# Altium PCB clock-temp-touch-sw.PcbDoc
Units mm, origin at the board's own origin, x right, y up, seen from the top; angles counter-clockwise.
Board outline 151 x 86.38 mm, 2 copper layers (Top Layer, Bottom Layer); 69 components, 37 nets, 179 pads, 0 vias.
Unrouted connection lines stored in the file: 14.
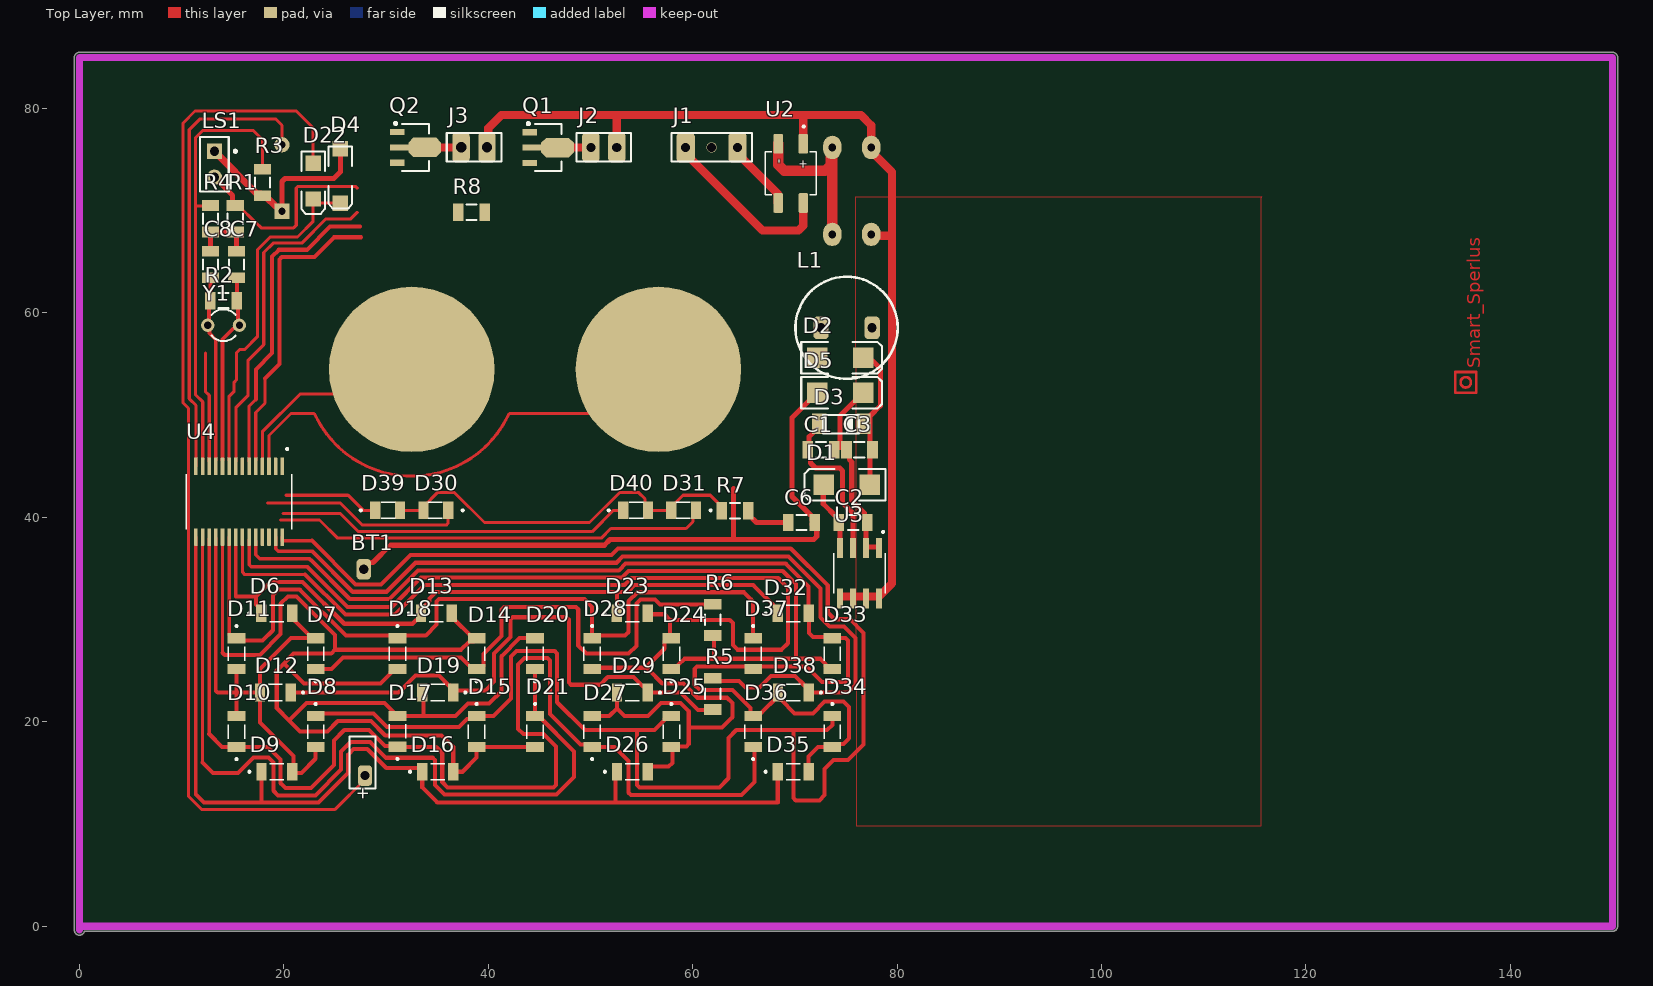
[diagram p0: Top Layer view]
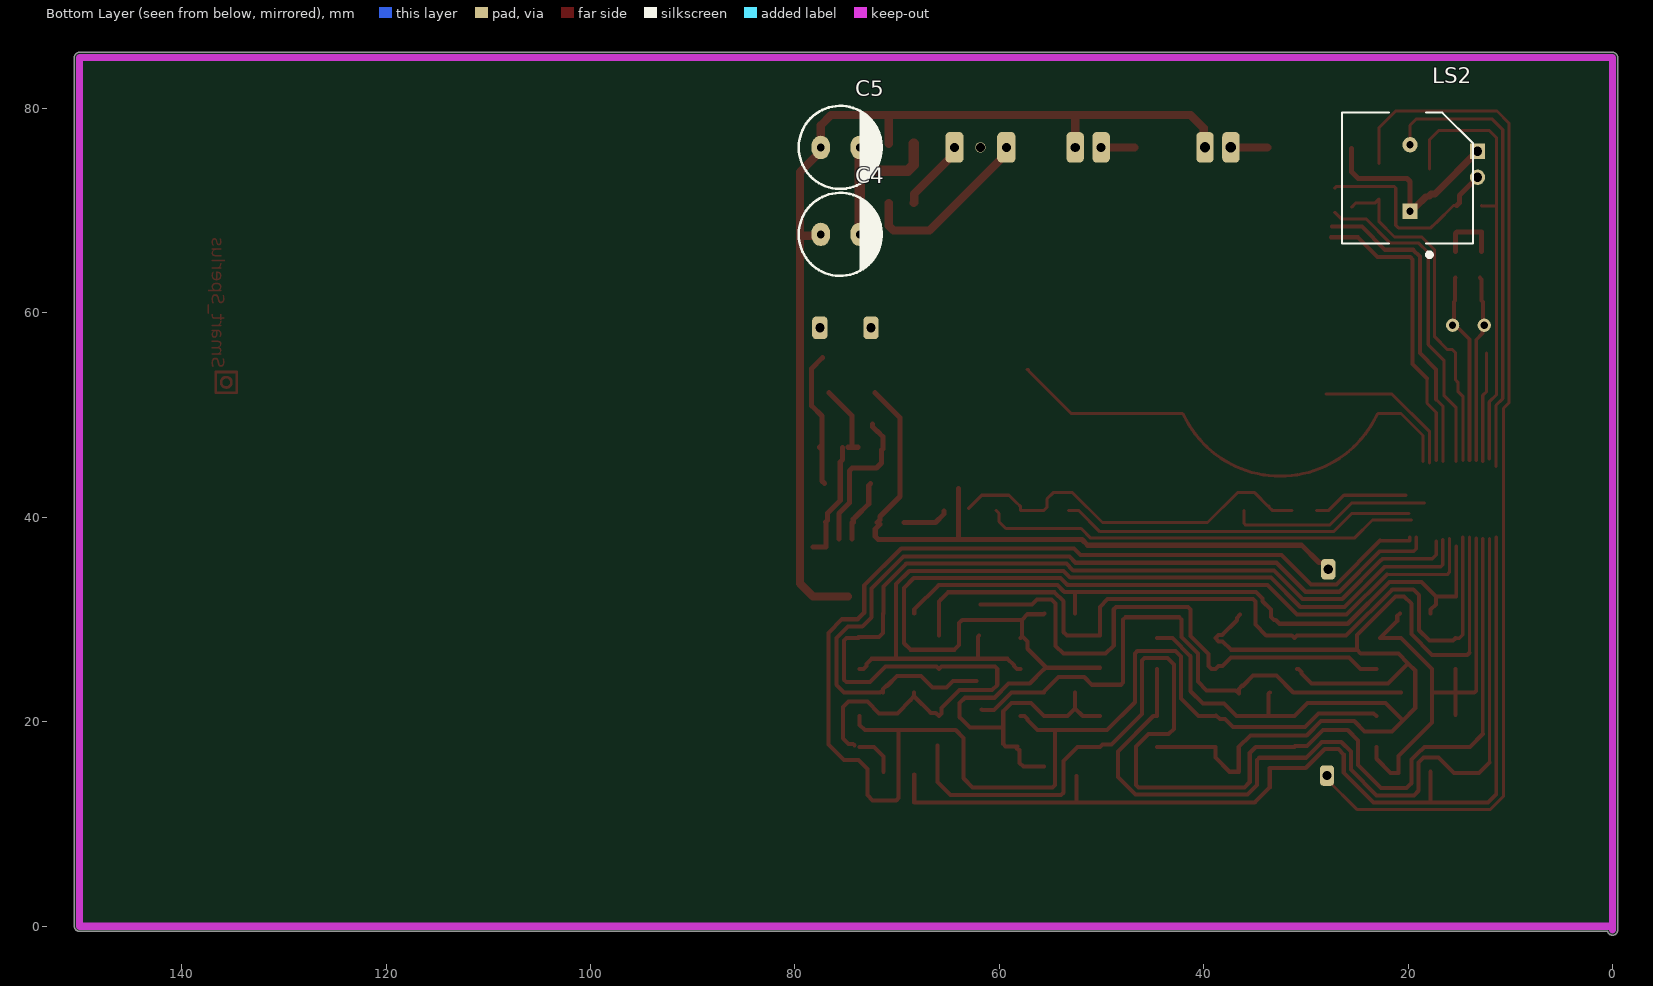
[diagram p1: Bottom Layer view, seen from below]

## Layer stack, top to bottom
Top Solder: solder mask 0.0102, Solder Resist, Dk 3.5
Top Layer: signal copper 0.0356
Dielectric 1: dielectric 0.32, FR-4, Dk 4.8
Bottom Layer: signal copper 0.0356
Bottom Solder: solder mask 0.0102, Solder Resist, Dk 3.5

## Board outline
-0.5,-0.381 -0.5,85 cw(c0,85) 0,85.5 150,85.5 cw(c150,85) 150.5,85 150.5,0 cw(c150,0) 150,-0.5 0.486,-0.5 cw(c0,-0.381)

## Design rules (kind name [scope] priority, off if disabled: settings)
Clearance Clearance_1 [InPolygon] p1: gap=0.3 ignorepadtopadclearanceinfootprint=FALSE
Clearance [All] p2: gap=0.3 ignorepadtopadclearanceinfootprint=FALSE
PolygonConnect [All] p1: connectstyle=Relief reliefconductorwidth=0.254 reliefentries=4 polygonreliefangle="90 Angle" airgapwidth=0.254
RoomDefinition clock-temp-touch-sw [InComponentClass('clock-temp-touch-sw')] p1: confinementstyle=ConfineIn formatcopy=TRUE lockcomponents=FALSE outline 144.907,-4.953 247.904,-4.953 247.904,23.114 144.907,23.114
RoutingLayers [All] p1: top layer_v5=FALSE bottom layer_v5=TRUE
RoutingVias [All] p1: holewidth=0.711 width=2.5 viastyle="Through Hole" minholewidth=0.711 minwidth=1.27 maxholewidth=0.711 maxwidth=2
SolderMaskExpansion [All] p1: expansion=0.102 istentingtop=FALSE
Width [All] p1: maxlimit=3 minlimit=0.3 preferedwidth=1
29 further rules are at their usual default settings.

## Components (designator, comment, footprint, x,y, rotation, side; value= is the part's Value field where it differs from the comment)
BT1 "Battery" BAT-2 27.686,16.002 r90 top
C1 "=Value" "CAP 1206"#1 72.517,46.609 r0 top
C2 "=Value" "CAP 1206"#2 75.692,39.497 r0 top
C3 "=Value" "CAP 1206"#3 76.327,46.609 r180 top
C4 "=Value" ELEC-CAP-RAD15-30 75.565,67.691 r0 bottom
C5 "=Value" ELEC-CAP-RAD15-30 75.565,76.2 r0 bottom
C6 "=Value" "CAP 1206"#1 70.612,39.497 r0 top
C7 "=Value" "CAP 1206"#1 15.367,64.77 r270 top
C8 "=Value" "CAP 1206"#1 12.827,64.77 r270 top
D1 "D Schottky" SMB 75.057,43.18 r180 top
D2 "D Schottky" SMB 74.422,55.626 r0 top
D3 "Zener Diode" DO-35 72.009,49.149 r0 top
D4 "18 Zener" 3.2X1.6X1.1#1 25.527,73.406 r270 top
D5 "D Schottky" SMB 74.422,52.197 r0 top
D6 "LHN974_RED_LED_1206" LEDC3216X120N#1 19.304,30.607 r0 top
D7 "LHN974_RED_LED_1206" LEDC3216X120N#1 23.114,26.67 r90 top
D8 "LHN974_RED_LED_1206" LEDC3216X120N#1 23.114,19.05 r270 top
D9 "LHN974_RED_LED_1206" LEDC3216X120N#1 19.318,15.113 r0 top
D10 "LHN974_RED_LED_1206" LEDC3216X120N#1 15.367,19.05 r90 top
D11 "LHN974_RED_LED_1206" LEDC3216X120N#1 15.367,26.67 r270 top
D12 "LHN974_RED_LED_1206" LEDC3216X120N#1 19.177,22.86 r180 top
D13 "LHN974_RED_LED_1206" LEDC3216X120N#1 34.925,30.607 r0 top
D14 "LHN974_RED_LED_1206" LEDC3216X120N#1 38.862,26.67 r90 top
D15 "LHN974_RED_LED_1206" LEDC3216X120N#1 38.862,19.05 r270 top
D16 "LHN974_RED_LED_1206" LEDC3216X120N#1 35.052,15.113 r0 top
D17 "LHN974_RED_LED_1206" LEDC3216X120N#1 31.115,19.064 r90 top
D18 "LHN974_RED_LED_1206" LEDC3216X120N#1 31.115,26.67 r270 top
D19 "LHN974_RED_LED_1206" LEDC3216X120N#1 35.052,22.86 r180 top
D20 "LHN974_RED_LED_1206" LEDC3216X120N#1 44.577,26.67 r90 top
D21 "LHN974_RED_LED_1206" LEDC3216X120N#1 44.577,19.05 r270 top
D22 "D Tunnel1" 3.2X1.6X1.1#2 22.86,72.898 r270 top
D23 "LHN974_RED_LED_1206" LEDC3216X120N#1 54.088,30.607 r0 top
D24 "LHN974_RED_LED_1206" LEDC3216X120N#1 57.912,26.67 r90 top
D25 "LHN974_RED_LED_1206" LEDC3216X120N#1 57.912,19.05 r270 top
D26 "LHN974_RED_LED_1206" LEDC3216X120N#1 54.102,15.113 r0 top
D27 "LHN974_RED_LED_1206" LEDC3216X120N#1 50.165,19.05 r90 top
D28 "LHN974_RED_LED_1206" LEDC3216X120N#1 50.165,26.67 r270 top
D29 "LHN974_RED_LED_1206" LEDC3216X120N#1 54.102,22.86 r180 top
D30 "LHN974_RED_LED_1206" LEDC3216X120N#2 34.798,40.693 r180 top
D31 "LHN974_RED_LED_1206" LEDC3216X120N#2 59.055,40.693 r180 top
D32 "LHN974_RED_LED_1206" LEDC3216X120N#1 69.836,30.607 r0 top
D33 "LHN974_RED_LED_1206" LEDC3216X120N#1 73.66,26.67 r90 top
D34 "LHN974_RED_LED_1206" LEDC3216X120N#1 73.66,19.05 r270 top
D35 "LHN974_RED_LED_1206" LEDC3216X120N#1 69.836,15.113 r0 top
D36 "LHN974_RED_LED_1206" LEDC3216X120N#1 65.913,19.05 r90 top
D37 "LHN974_RED_LED_1206" LEDC3216X120N#1 65.913,26.67 r270 top
D38 "LHN974_RED_LED_1206" LEDC3216X120N#1 69.85,22.86 r180 top
D39 "LHN974_RED_LED_1206" LEDC3216X120N#2 30.226,40.693 r0 top
D40 "LHN974_RED_LED_1206" LEDC3216X120N#2 54.483,40.693 r0 top
J1 "Header3X1" "HEADER 3X1" 59.309,76.2 r0 top
J2 "Header2X1" "Header 2X1"#1 51.308,76.2 r0 top
J3 "Header2X1" "Header 2X1"#2 38.608,76.2 r0 top
L1 "1mH" HS1101 75.057,58.547 r0 top
LS1 "Bell" PIN2 13.208,75.819 r270 top
LS2 "Buzzer" ABSM-1574 20.052,67.304 r90 bottom
Q1 "Triac" SOT89N 45.869,76.176 r0 top
Q2 "Triac" SOT89N 32.882,76.2 r0 top
R1 "10K" "RES 1206 (3216X08L)"#1 15.24,69.215 r90 top
R2 "10K" "RES 1206 (3216X08L)"#1 14.097,61.214 r0 top
R3 "10K" "RES 1206 (3216X08L)"#1 17.907,72.771 r270 top
R4 "10K" "RES 1206 (3216X08L)"#1 12.827,69.215 r270 top
R5 "10K" "RES 1206 (3216X08L)"#2 61.976,22.733 r90 top
R6 "10K" "RES 1206 (3216X08L)"#2 61.976,29.972 r90 top
R7 "10K" "RES 1206 (3216X08L)"#1 64.135,40.64 r180 top
R8 "10K" "RES 1206 (3216X08L)"#1 38.354,69.85 r0 top
U2 "MB6S" SOIC245P670X270-4N 69.596,73.66 r270 top
U3 "HT7A6312" SOIC127P599X175-8N 76.327,34.544 r270 top
U4 "MAX3241ECAI+T" SOP65P777X199-28N 15.621,41.529 r270 top
Y1 "XTAL" R38 14.097,58.801 r90 top

## Footprints (in the part's own frame and the unit in brackets; to place one, negate y for a bottom-side part, rotate by r counter-clockwise, add the part's x,y. Pads: shape width x height; smd on the part's side, far side on the other; paste and mask are expansions set on the pad)
3.2X1.6X1.1#1 [mm] "SMT LED; 2 Flat Leads"
  rect 1.5x1.5 smd: 1(-2.667,0) 2(2.667,0)
  silkscreen extent -2.9,-1.15 3.2,1.15
3.2X1.6X1.1#2 [mm] "SMT LED; 2 Flat Leads"
  rect 1.5x1.5 smd: 1(-1.75,0) 2(1.75,0)
  silkscreen extent -2.9,-1.15 3.2,1.15
ABSM-1574 [mm] "Magnetic Transducer Buzzer"
  rect 1.5x1.5 hole 0.7: 1A(2.65,-0.24)
  round 1.5 hole 0.7: 2A(9.15,-0.24)
  silkscreen extent -1.83,-6.4 12.3,6.4
BAT-2 [mm] "Battery; 2 Leads"
  rrect50% 2x1.4 hole 0.9: 1(-1.27,-0.254) 2(18.923,-0.127)
  silkscreen extent -2.54,-1.27 2.54,1.27
"CAP 1206"#1 [mm]
  rect 1.05x1.7 smd: 1(-1.27,0) 2(1.326,0)
  silkscreen extent -0.47,-0.75 0.53,0.75, body extent -1.49,-0.77 1.55,0.75, height 0.75
"CAP 1206"#2 [mm]
  rect 1.05x1.7 smd: 1(-1.397,0) 2(1.397,0)
  silkscreen extent -0.47,-0.75 0.53,0.75, body extent -1.49,-0.77 1.55,0.75, height 0.75
"CAP 1206"#3 [mm]
  rect 1.05x1.7 smd: 1(-1.27,0) 2(1.27,0)
  silkscreen extent -0.47,-0.75 0.53,0.75, body extent -1.49,-0.77 1.55,0.75, height 0.75
DO-35 [mm]
  rect 1.4x2 smd: 1(0.381,0) 2(4.699,0)
  silkscreen extent 0.76,-0.93 4.27,0.87, body extent -0.17,-0.81 5.35,0.84, height 1.81
ELEC-CAP-RAD15-30 [mil]
  oval 70x90 hole 30: 1(-75,0) 2(75,0)
  silkscreen extent -160,-160 160,160, body extent -167,-167 167,167, height 609
"Header 2X1"#1 [mm]
  rrect50% 1.7x3 hole 0.9: 1(-1.27,0) 2(1.27,0)
  silkscreen extent -2.67,-1.4 2.67,1.4, body extent -2.54,-1.27 2.54,1.27, height 9.5
"Header 2X1"#2 [mm]
  rrect50% 1.7x3 hole 1.016: 1(-1.27,0) 2(1.27,0)
  silkscreen extent -2.67,-1.4 2.67,1.4, body extent -2.54,-1.27 2.54,1.27, height 9.5
"HEADER 3X1" [mm]
  rrect50% 1.8x3 hole 0.9: 1(0,0) 3(5.08,0)
  round 1 hole 0.9: 2(2.54,0)
  silkscreen extent -1.4,-1.4 6.48,1.4, body extent -1.24,-1.27 6.38,1.27, height 8.38
HS1101 [mm] "HUMIDITY SENSOR"
  rrect50% 1.5x2.2 hole 0.9: 1(2.5,0) 2(-2.5,0)
  silkscreen extent -5,-5 5,5
LEDC3216X120N#1 [mm]
  rect 1.01x1.73 smd: NEG(1.51,0) POS(-1.51,0)
  silkscreen extent -2.8,-0.8 0.68,0.8
LEDC3216X120N#2 [mm]
  rect 1.01x1.73 smd: NEG(1.143,0) POS(-1.27,0)
  silkscreen extent -2.8,-0.8 0.68,0.8
PIN2 [mm] "Photosensitive Diode; 2 Leads"
  rect 1.5x1.5 hole 0.9: 1(0,0)
  round 1.5 hole 0.9: 2(2.54,0)
  silkscreen extent -1.4,-1.4 3.94,2.18
R38 [mm] "Crystal, Thru-Hole; 2 Leads; Body 3.1 x 8.2 mm (Dia.xH)"
  round 1.3 hole 0.7: 1(0,1.55) 2(0,-1.55)
  silkscreen extent -1.55,-1.19 1.55,1.17
"RES 1206 (3216X08L)"#1 [mm] "Chip Resistor, 2-Leads, Body 3.2x1.6mm, IPC High Density _ (0.125 W)"
  rect 1.05x1.7 smd: 1(-1.295,0) 2(1.301,0)
  silkscreen extent -0.5,-0.75 0.5,0.75, body extent -1.52,-0.76 1.53,0.76, height 0.6
"RES 1206 (3216X08L)"#2 [mm] "Chip Resistor, 2-Leads, Body 3.2x1.6mm, IPC High Density _ (0.125 W)"
  rect 1.05x1.7 smd: 1(-1.524,0) 2(1.524,0)
  silkscreen extent -0.5,-0.75 0.5,0.75, body extent -1.52,-0.76 1.53,0.76, height 0.6
SMB [mm] "DO-214-AA/SMB; 2 C-Bend Leads; Body 5.3 x 3.6 mm, inc. leads (LxW)"
  rect 2x2 smd: 1(-2.25,0) 2(2.25,0)
  silkscreen extent -3.8,-1.55 4.1,1.55
SOIC127P599X175-8N [mm]
  rrect25% 1.97x0.6 smd: 1(-2.47,1.905) 2(-2.47,0.635) 3(-2.47,-0.635) 4(-2.47,-1.905) 5(2.47,-1.905) 6(2.47,-0.635) 7(2.47,0.635) 8(2.47,1.905)
  silkscreen extent -4.14,-2.52 1.95,2.52
SOIC245P670X270-4N [mm]
  rrect23% 1.91x0.91 smd: 1(-2.9,1.225) 2(-2.9,-1.225) 3(2.9,-1.225) 4(2.9,1.225)
  silkscreen extent -4.68,-2.48 2.1,2.48
SOP65P777X199-28N [mm]
  rrect25% 1.7x0.35 smd: 1(-3.46,4.225) 2(-3.46,3.575) 3(-3.46,2.925) 4(-3.46,2.275) 5(-3.46,1.625) 6(-3.46,0.975) 7(-3.46,0.325) 8(-3.46,-0.325) 9(-3.46,-0.975) 10(-3.46,-1.625) 11(-3.46,-2.275) 12(-3.46,-2.925) 13(-3.46,-3.575) 14(-3.46,-4.225) 15(3.46,-4.225) 16(3.46,-3.575) 17(3.46,-2.925) 18(3.46,-2.275) 19(3.46,-1.625) 20(3.46,-0.975) 21(3.46,-0.325) 22(3.46,0.325) 23(3.46,0.975) 24(3.46,1.625) 25(3.46,2.275) 26(3.46,2.925) 27(3.46,3.575) 28(3.46,4.225)
  silkscreen extent -5.26,-5.17 2.69,5.17, body extent -3.89,-5.1 3.89,5.1, height 1.99
SOT89N [mm] "SOT89, 3-Leads, Body 4.5x2.4 mm, Pitch 1.5mm, Lead Span 4.1mm, IPC Medium Density"
  rect 1.4x0.6 smd: 1(-1.8,1.5) 3(-1.8,-1.5)
  rect 1.8x0.6 smd: 2(-1.6,0)
  oct 3.2x1.9 smd: 2(0.9,0)
  silkscreen extent -2.07,-2.3 1.3,2.47, body extent -1.3,-2.3 1.3,2.3, height 1.6

## Part data
BT1: "Multicell Battery", LatestRevisionDate=17-Jul-2002, LatestRevisionNote="Re-released for DXP Platform.", PackageDescription="Battery; 2 Leads", PackageReference=BAT-2, Published=24-Mar-1999, Publisher="Altium Limited"
C1 C2 C3 C6 C7 C8: library part Capacitor, "Capacitor"
C4 C5: library part "Capacitor Electrolytic", "Electrolytic Capacitor"
D1 D2 D5: "Schottky Diode", Code_JEDEC=DO-214-AA, LatestRevisionDate=17-Jul-2002, LatestRevisionNote="Re-released for DXP Platform.", PackageDescription="DO-214-AA/SMB; 2 C-Bend Leads; Body 5.3 x 3.6 mm, inc. leads (LxW)", PackageReference=SMB, Published=8-Jun-2000, Publisher="Altium Limited"
D4: library part "D Zener", "Zener Diode", LatestRevisionDate=17-Jul-2002, LatestRevisionNote="Re-released for DXP Platform.", PackageReference=DIODE-0.7, Published=8-Jun-2000, Publisher="Altium Limited"
D6 D7 D8 D9 D10 D11 D12 D13 D14 D15 D16 D17 D18 D19 D20 D21 D23 D24 D25 D26 D27 D28 D29 D30 D31 D32 D33 D34 D35 D36 D37 D38 D39 D40: "2.6 V Red LED SMD", Package=None, Availability="Not in stock", Check_prices=https://www.snapeda.com/parts/LHN974%20RED%20LED%201206/Osram/view-part/7899607/?ref=eda, MF=Osram, MP="LHN974 RED LED 1206", Price=None, SnapEDA_Link=https://www.snapeda.com/parts/LHN974%20RED%20LED%201206/Osram/view-part/7899607/?ref=snap
D22: "Tunnel Diode - RLC Model", LatestRevisionDate=17-Jul-2002, LatestRevisionNote="Re-released for DXP Platform.", PackageDescription="SM LED; 2 Flat Leads", PackageReference=3.2X1.6X1.1, PackageVersion=Feb-2002, Published=8-Jun-2000, Publisher="Altium Limited"
L1: library part Inductor, "Inductor", Code_IEC=1005, Code_JEITA=0402, LatestRevisionDate=17-Jul-2002, LatestRevisionNote="Re-released for DXP Platform.", PackageReference=0402-A, Published=8-Jun-2000, Publisher="Altium Limited"
LS1: "Electrical Bell", LatestRevisionDate=17-Jul-2002, LatestRevisionNote="Re-released for DXP Platform.", PackageReference=PIN2, Published=24-Mar-1999, Publisher="Altium Limited"
LS2: "Magnetic Transducer Buzzer", ComponentLink1Description="Manufacturer Link", ComponentLink1URL=http://www.megastar.com/linecard/buzzmode/index.php, DatasheetVersion=17-Dec-2003, LatestRevisionDate=17-Dec-2003, LatestRevisionNote="Schematic revised, PCB Footprint replaced.", PackageDescription="Magnetic Transducer Buzzer", PackageReference=ABSM-1574, Published=24-Mar-1999, Publisher="Altium Limited"
Q1 Q2: "Silicon Bidirectional Triode Thyristor", ComponentLink1Description="Manufacturer Link", ComponentLink1URL=http://www.motorola.com/, DatasheetVersion=1999, LatestRevisionDate=17-Jul-2002, LatestRevisionNote="Re-released for DXP Platform.", Note="Pin 2 is electrically connected to Pin 4 (TAB)", PackageDescription="TO, Thru-Hole, Vertical, Heatsink Mounted; 3 In-Line Leads; Pitch 2.28 mm", PackageReference=369-03, Published=29-Sep-2000, Publisher="Altium Limited"
R1 R2 R3 R4 R5 R6 R7 R8: library part Resistor, "Resistor", Power="1/4 W", Tolerance=5%
U2: "Bridge Rectifier Single Phase Standard 600V Surface Mount 4-SOIC", Package="BESOP-4 Surge Components", Digi-Key_Part_Number=MB6SCT-ND, Digi-Key_Purchase_URL=https://www.digikey.com.tr/product-detail/en/on-semiconductor/MB6S/MB6SCT-ND/965654?utm_source=snapeda&utm_medium=aggregator&utm_campaign=symbol, MF="ON Semiconductor", MP=MB6S, SnapEDA_Link=https://www.snapeda.com/parts/MB6S/ON%20Semiconductor/view-part/2774209/?ref=snap
U3: library part Component_1
U4: "±15kV ESD-Protected, Down to 10nA, 3.0V to 5.5V, Up to 1Mbps, True RS-232 Transceivers", Package="SSOP-28 Maxim", Check_prices=https://www.snapeda.com/parts/MAX3241ECAI+T/Analog+Devices/view-part/?ref=eda, MF="Analog Devices", MP=MAX3241ECAI+T, SnapEDA_Link=https://www.snapeda.com/parts/MAX3241ECAI+T/Analog+Devices/view-part/?ref=snap
Y1: "Crystal Oscillator", LatestRevisionDate=17-Jul-2002, LatestRevisionNote="Re-released for DXP Platform.", PackageDescription="Crystal, Thru-Hole; 2 Leads; Body 3.1 x 8.2 mm (Dia.xH)", PackageReference=R38, Published=8-Jun-2000, Publisher="Altium Limited"
D3: MODEL=1N

## Free pads (board coordinates)
  round 16.2 smd: 10(32.512,54.483) 10(56.642,54.483)

## Nets (pads, with @x,y where several pads share a name; then routed paths per layer and width w, separated by ;. In a path a pad name is that pad's centre, name@x,y a point inside that pad or via, vN(x,y) a via of type N, cw(c..) or ccw(c..) an arc to the next point about the centre after c; other vN are vias at no path point)
+12v: C6.1 D2.1 D4.2 L1.2 R7.1 | length 4.6
  Top Layer w0.5: R7.1 65.43,40.315 66.248,39.497 C6.1
adc: LS1.2 R1.2 U4.8 | length 52.7
  Top Layer w0.3: R1.2 15.565,70.516 17.247,68.834 17.272,68.834 17.78,68.326 20.955,68.326 21.209,68.58 21.209,72.214 21.385,72.39 27.002,72.39 27.178,72.214 ; U4.8@15.296,45.466 15.296,50.729 16.51,51.943 16.51,55.372 18.034,56.896 18.034,65.913 18.953,66.832 21.747,66.832 24.13,69.215 26.543,69.215 27.178,69.85
  Top Layer w0.5: LS1.2 14.989,71.498 14.989,70.766 R1.2
bizer: LS2.2A U4.14 | length 44.9
  Top Layer w0.3: U4.14 11.396,50.961 10.742,51.615 10.742,77.925 11.811,78.994 19.177,78.994 19.812,78.359 LS2.2A
dot: D20.POS D21.POS U4.16 | length 82.3
  Top Layer w0.33: U4.16@12.036,37.894 12.036,16.046 12.051,16.031
  Top Layer w0.4: 12.051,16.031 12.051,16.016 13.081,14.986 15.494,14.986 17.018,16.51 18.488,16.51 18.966,16.032 18.966,13.253 19.411,12.807 23.094,12.807 25.602,15.315 25.602,17.093 26.543,18.034 28.448,18.034 30.004,16.478 34.564,16.478 34.798,16.244 34.798,13.81 35.719,12.889 46.665,12.889 48.387,14.611 48.387,17.11 44.937,20.56 D21.POS D20.POS
GND: BT1.2 C4.1 C5.1 C6.2 C7.1 C8.1 D4.1 D5.1 Q1.3 Q2.3 R1.1 R4.2 U2.2 U4.12 | length 101.7
  Top Layer w0.3: 12.319,56.089 12.319,52.324 12.7,51.943 U4.12@12.7,45.466
  Top Layer w0.5: C8.1 R4.2 12.83,67.917 15.237,67.917 15.367,67.787 C7.1 ; BT1.2 27.813,35.133 28.255,35.576 28.718,35.576 30.415,37.273 51.344,37.273 51.917,37.846 64.008,37.846 ; 64.008,42.799 64.008,37.846 ; C6.2@71.663,39.331 72.136,38.858 72.136,38.139 71.843,37.846 64.008,37.846 ; C6.2 71.663,39.772 71.663,40.097 69.723,42.037 69.723,49.748 D5.1
  Top Layer w1: U2.2 68.371,74.504 68.961,73.914 72.947,73.914 73.511,74.478 73.511,76.051 C5.1 C4.1
inpout: R3.1 R4.1 U4.13 | length 43.3
  Top Layer w0.3: U4.13@12.065,45.72 12.065,51.308 11.342,52.031 11.342,70.485 ; R4.1 12.802,70.485 11.342,70.485 ; R3.1 17.907,76.962 17.018,77.851 12.065,77.851 11.342,77.128 11.342,70.485
l1: D6.POS D13.POS D23.POS D32.POS U4.21 | length 67.7
  Top Layer w0.33: 15.286,37.194 15.286,32.297 15.311,32.272
  Top Layer w0.4: 15.311,32.272 17.286,32.272 ; D6.POS 17.794,30.967 17.286,31.475 17.286,32.272 ; D23.POS 52.578,32.698 ; D32.POS 68.326,30.967 65.921,33.372 54.306,33.372 53.694,32.76 53.632,32.698 52.578,32.698 ; 17.286,32.272 18.672,33.658 21.841,33.658 25.908,29.591 32.602,29.591 32.953,29.942 33.11,29.942 33.415,30.247 33.415,30.967 34.243,31.795 34.243,32.054 34.887,32.698 52.578,32.698
l2: D7.POS D14.POS D24.POS D33.POS R6.1 R6.2 U4.23 | length 139.2
  Top Layer w0.33: U4.23@16.606,37.812 16.606,35.372 16.799,35.179 22.303,35.179 22.328,35.155
  Top Layer w0.4: 22.328,35.155 26.24,31.242 30.555,31.242 33.411,34.098 53.052,34.098 53.114,34.16 53.726,34.772 68.811,34.772 70.104,33.479 70.104,26.165 ; D7.POS 24.652,25.16 25.781,26.289 37.338,26.289 38.162,25.465 38.557,25.465 D14.POS 39.222,25.16 39.527,25.465 39.527,26.642 41.284,28.399 41.284,31.002 41.519,31.236 45.546,31.236 45.552,31.242 48.566,31.242 48.8,31.008 48.8,27.468 49.598,26.67 53.721,26.67 54.483,27.432 54.483,31.569 54.886,31.972 56.31,31.972 56.786,31.496 R6.2@61.849,31.496 ; D24.POS 58.272,25.16 58.577,25.465 58.577,25.557 59.185,26.165 62.103,26.165 ; R6.1 62.103,28.321 62.103,26.165 ; D33.POS 73.3,25.16 72.995,25.465 72.995,25.674 72.504,26.165 70.104,26.165 ; 62.103,26.165 70.104,26.165
L3: D8.POS D15.POS D25.POS D34.POS U4.28 | length 171.5
  Top Layer w0.33: U4.28 19.846,37.729 19.856,37.719 22.733,37.719
  Top Layer w0.4: 22.733,37.719 27.027,33.425 29.488,33.425 32.385,36.322 52.07,36.322 52.705,36.957 69.596,36.957 73.217,33.336 73.217,30.669 73.849,30.037 75.373,30.037 76.708,28.702 76.708,17.78 75.184,16.256 73.787,16.256 72.898,15.367 72.898,12.827 72.39,12.319 70.084,12.319 69.85,12.553 69.85,19.177 ; D8.POS 23.382,20.828 28.751,20.828 30.083,19.496 37.149,19.496 37.908,20.255 38.416,20.255 D15.POS@38.791,20.63 ; D15.POS 40.499,20.56 42.226,22.287 42.226,26.371 42.779,26.924 46.502,26.924 46.736,26.69 46.736,21.912 49.471,19.177 53.405,19.177 54.548,19.177 ; D25.POS 57.552,20.56 57.247,20.255 57.247,20.163 56.261,19.177 54.548,19.177 ; D34.POS 73.66,19.685 73.152,19.177 69.85,19.177 ; 54.548,19.177 54.548,13.823 54.782,13.589 62.611,13.589 63.5,14.478 63.5,18.415 64.262,19.177 69.85,19.177
L4: D9.POS D16.POS D26.POS D35.POS U4.15 | length 97.3
  Top Layer w0.33: 11.386,12.901 U4.15@11.386,38.07
  Top Layer w0.4: 11.386,12.901 12.18,12.107 17.808,12.107 ; D9.POS 17.808,12.107 ; D26.POS@52.451,14.713 52.451,12.107 ; D35.POS@68.326,14.859 68.326,12.107 52.451,12.107 ; 17.808,12.107 23.384,12.107 26.302,15.026 26.302,16.804 26.833,17.334 28.158,17.334 30.019,15.473 33.542,15.473 33.542,13.575 35.01,12.107 52.451,12.107
L5: D10.POS D17.POS D27.POS D36.POS U4.17 | length 116.8
  Top Layer w0.33: U4.17@12.696,37.904 12.696,18.805 12.701,18.8
  Top Layer w0.4: 12.701,18.8 12.701,18.795 13.956,17.54 18.401,17.54 18.763,17.178 18.81,17.178 19.666,16.322 19.666,13.989 20.148,13.507 22.651,13.507 24.903,15.759 24.903,18.172 25.908,19.177 28.321,19.177 29.884,17.614 31.055,17.614 D17.POS ; D17.POS@31.115,17.54 34.911,17.54 35.498,16.953 35.498,14.1 36.009,13.589 46.375,13.589 46.609,13.823 46.609,17.585 45.398,18.796 43.434,18.796 42.926,19.304 42.926,25.609 43.541,26.224 45.802,26.224 46.036,25.99 46.036,20.766 49.004,17.798 49.907,17.798 D27.POS 52.355,17.54 53.721,16.174 53.721,13.061 53.955,12.827 64.77,12.827 66.04,14.097 D36.POS@66.04,17.681
L6: D11.POS D18.POS D28.POS D37.POS U4.20 | length 80.4
  Top Layer w0.33: U4.20 14.646,28.713 14.667,28.692 14.667,28.52 15.007,28.18 D11.POS
  Top Layer w0.4: D11.POS 15.487,28.06 15.607,27.94 17.907,27.94 18.923,28.956 18.923,32.385 19.496,32.958 21.551,32.958 26.073,28.436 30.859,28.436 D18.POS 31.383,28.448 33.884,28.448 34.943,29.507 34.943,31.764 35.177,31.998 49.409,31.998 50.165,31.242 50.165,28.434 53.392,28.434 53.721,28.763 53.721,31.797 54.596,32.672 65.005,32.672 65.679,31.998 ; 65.679,31.998 65.913,31.764 D37.POS@65.913,28.434
L7: D12.POS D19.POS D29.POS D38.POS R5.1 R5.2 U4.27 | length 142.6
  Top Layer w0.33: U4.27 19.196,36.938 19.431,36.703 22.759,36.703 22.81,36.653
  Top Layer w0.4: D12.POS 31.242,22.86 32.893,24.511 35.179,24.511 36.165,23.525 36.257,23.525 36.562,23.22 D19.POS 36.562,22.777 36.867,23.082 39.719,23.082 40.575,23.938 40.575,26.7 42.164,28.289 42.164,29.992 42.398,30.226 47.645,30.226 47.879,29.992 47.879,23.856 48.113,23.622 50.927,23.622 51.689,24.384 54.215,24.384 D29.POS@55.739,22.86 ; 22.81,36.653 26.737,32.725 30.058,32.725 32.893,35.56 52.534,35.56 53.146,36.172 69.391,36.172 72.517,33.046 72.517,30.226 73.406,29.337 74.797,29.337 75.946,28.188 75.946,23.622 75.184,22.86 71.665,22.86 D38.POS@71.55,22.975 ; D29.POS D29.POS@55.739,22.86 ; R5.1@61.722,21.209 61.668,21.155 60.506,21.155 58.801,22.86 D29.POS@55.739,22.86 ; R5.2@62.23,24.003 64.516,24.003 65.151,23.368 66.548,23.368 67.668,24.488 70,24.488 70.963,23.525 71.055,23.525 71.36,23.22 71.36,22.975 D38.POS
NetBT1_1: BT1.1 D22.1 | length 102.8
  Top Layer w0.3: D22.1 22.86,78.105 21.209,79.756 11.303,79.756 10.142,78.595 10.142,51.199 10.668,50.673 10.668,12.7 11.938,11.43 25.019,11.43 27.94,14.351 BT1.1
NetC1_1: C1.1 D3.1 U3.3 | length 14.9
  Top Layer w0.5: D3.1 72.39,48.849 71.94,48.399 71.894,48.399 71.393,47.898 71.393,46.717 71.522,46.588 71.522,45.318 72.009,44.831 74.383,44.831 74.676,44.538 74.676,41.414 75.692,40.398 U3.3@75.692,37.903
NetC1_2: C1.2 C2.2 C3.2 D5.2 L1.1 U3.1 U3.2 | length 18.9
  Top Layer w0.5: C1.2@73.843,46.863 74.422,46.863 ; C3.2@74.803,46.863 74.422,46.863 ; C3.2@75.332,46.842 75.332,45.648 75.565,45.415 75.565,41.656 76.814,40.407 76.814,39.719 76.999,39.534 76.962,39.497 76.962,37.084 U3.1@78.205,37.084 ; D5.2 74.422,49.947 74.422,46.863
NetC2_1: C2.1 D1.2 U3.4 | length 6.1
  Top Layer w0.5: D1.2@72.589,43.307 72.771,43.125 72.771,41.337 74.011,40.097 74.02,40.097 74.295,39.822 C2.1 ; U3.4@74.422,37.903 C2.1@74.422,39.497
NetC3_1: C3.1 D1.1 D2.2 D3.2 | length 14
  Top Layer w0.5: D1.1@77.089,43.307 77.343,43.561 C3.1@77.343,46.609 ; D2.2@77.318,55.615 78.359,54.574 78.359,50.927 77.343,49.911 C3.1@77.343,47.117 ; C3.1@77.343,46.609 77.597,46.863 C3.1@77.343,47.117 ; C3.1@77.343,46.609 C3.1@77.343,47.117
NetC7_2: C7.2 R2.2 U4.10 Y1.2 | length 18.8
  Top Layer w0.35: U4.10@13.996,45.593 13.996,57.43 15.026,58.46 15.049,58.46 15.39,58.801 15.522,58.801 Y1.2
  Top Layer w0.4: C7.2 15.398,63.413 R2.2 15.522,61.089 Y1.2@15.522,58.801
NetC8_2: C8.2 R2.1 U4.11 Y1.1 | length 18.2
  Top Layer w0.35: Y1.1@12.674,58.801 12.723,58.752 12.723,58.016 13.346,57.393 U4.11@13.346,45.593
  Top Layer w0.4: Y1.1@12.674,58.801 12.674,61.087 R2.1 12.802,63.292 C8.2@12.954,63.444
NetD30_NEG: D30.NEG D31.NEG D39.NEG D40.NEG R7.2 | length 37.4
  Top Layer w0.3: D39.NEG 33.3,40.693 33.607,41 33.607,41.1 33.703,41.1 35.02,42.418 36.703,42.418 39.624,39.497 49.911,39.497 52.832,42.418 54.737,42.418 55.341,41.814 55.341,40.978 D40.NEG D31.NEG 57.912,41.053 58.267,41.408 58.299,41.408 59.055,42.164 61.722,42.164 R7.2@62.992,40.894
NetJ1_1: J1.1 U2.4 | length 17.6
  Top Layer w0.8: J1.1 59.309,75.6 66.837,68.072 70.352,68.072 70.821,68.541 U2.4
NetJ1_3: J1.3 U2.3 | length 7.1
  Top Layer w0.8: J1.3 64.389,75.6 68.316,71.673 68.316,70.815 U2.3
NetJ2_1: J2.1 Q1.2 | length 3.3
  Top Layer w0.8: Q1.2@46.769,76.176 46.781,76.188 50.026,76.188 J2.1
NetJ3_1: J3.1 Q2.2 | length 3.6
  Top Layer w0.8: Q2.2@33.782,76.2 J3.1
NetQ2_3: Q2.1
out1: R8.1 U4.6 | length 30.8
  Top Layer w0.3: U4.6@16.596,45.466 16.596,50.886 17.272,51.562
  Top Layer w0.4: 17.272,51.562 17.272,54.483 18.858,56.069 18.858,65.538 19.502,66.182 22.244,66.182 24.515,68.453 27.432,68.453
out2: U4.5 | length 29.5
  Top Layer w0.3: U4.5@17.246,45.593 17.246,50.266 18.161,51.181 18.161,53.594
  Top Layer w0.4: 18.161,53.594 19.558,54.991 19.558,65.248 19.792,65.482 22.987,65.482 24.91,67.405 27.527,67.405
R1: D32.NEG D33.NEG D34.NEG D35.NEG D36.NEG D37.NEG D38.NEG U4.24 | length 117.5
  Top Layer w0.33: U4.24@17.256,37.673 17.256,36.338 17.653,35.941 22.531,35.941 22.632,35.84
  Top Layer w0.4: 22.632,35.84 26.447,32.025 30.348,32.025 33.121,34.798 52.762,34.798 52.824,34.86 53.436,35.472 69.101,35.472 71.346,33.227 D32.NEG ; D38.NEG D38.NEG@68.34,22.5 ; D35.NEG 71.346,16.609 72.277,17.54 D34.NEG ; D32.NEG@71.374,30.607 71.374,28.702 71.769,28.307 D33.NEG@73.787,28.307 ; D33.NEG@73.787,28.194 74.95,28.194 75.184,27.96 75.184,24.11 74.95,23.876 72.644,23.876 71.12,25.4 66.153,25.4 D37.NEG 65.673,25.4 60.432,25.4 60.198,25.166 60.198,23.622 60.706,23.114 63.881,23.114 65.659,21.336 65.659,20.814 D36.NEG 66.218,20.865 66.705,20.865 D38.NEG@68.34,22.5 ; D34.NEG@74.188,17.708 74.325,17.845 74.769,17.845 75.311,18.387 75.311,21.429 74.769,21.971 72.898,21.971 71.755,20.828 69.977,20.828 68.645,22.16 68.645,22.195 68.375,22.465 68.34,22.465 D38.NEG@68.34,22.5
R2: D23.NEG D24.NEG D25.NEG D26.NEG D27.NEG D28.NEG D29.NEG U4.22 | length 130.9
  Top Layer w0.33: U4.22@15.956,37.892 15.956,34.61 16.161,34.406 22.087,34.406
  Top Layer w0.4: 22.087,34.406 26.012,30.48 30.861,30.48 33.779,33.398 53.342,33.398 53.404,33.46 54.016,34.072 68.372,34.072 69.342,33.102 69.342,27.686 68.707,27.051 64.389,27.051 63.937,27.503 63.937,29.662 63.627,29.972 57.785,29.972 ; D27.NEG 51.836,20.56 52.592,21.316 ; D28.NEG@50.165,25.287 55.386,25.287 ; D29.NEG 52.592,21.316 ; D23.NEG 55.679,30.526 57.231,30.526 57.785,29.972 ; D26.NEG@55.612,15.621 57.648,15.621 58.009,15.982 58.009,17.235 58.136,17.235 D25.NEG@58.314,17.413 ; 55.632,25.14 55.485,25.287 55.386,25.287 ; 55.66,25.112 57.023,23.749 59.081,23.749 60.478,22.352 63.373,22.352 63.881,21.844 63.881,20.447 62.865,19.431 59.611,19.431 ; D24.NEG D24.NEG@57.785,28.307 ; D25.NEG@58.214,17.574 59.377,17.574 59.611,17.808 59.611,19.431 ; 52.592,21.316 53.334,20.574 55.626,20.574 56.896,21.844 58.801,21.844 59.611,21.034 59.611,19.431 ; 55.386,25.287 57.247,27.148 57.247,27.875 57.679,28.307 D24.NEG@57.785,28.307 ; D24.NEG@57.785,28.307 57.785,29.972
R3: D13.NEG D14.NEG D15.NEG D16.NEG D17.NEG D18.NEG D19.NEG D20.NEG D21.NEG U4.19 | length 134.4
  Top Layer w0.33: U4.19 13.996,26.764 14.006,26.754
  Top Layer w0.4: 14.006,26.754 14.217,26.543 17.653,26.543 19.685,28.575 19.685,29.337 19.682,29.34 19.682,31.552 20.388,32.258 21.24,32.258 25.019,28.479 25.019,27.051 ; D18.NEG@30.861,25.146 30.741,25.146 30.45,24.855 30.45,24.735 29.464,23.749 21.971,23.749 20.002,25.717 ; D19.NEG 33.655,22.747 33.655,20.574 ; D13.NEG@36.435,30.48 36.74,30.175 36.74,29.935 38.19,28.485 38.557,28.485 D14.NEG 38.557,27.875 38.162,27.875 37.338,27.051 25.019,27.051 ; D21.NEG D15.NEG 38.862,16.51 37.465,15.113 D16.NEG 36.576,15.127 36.576,17.526 35.433,18.669 29.92,18.669 28.523,20.066 25.273,20.066 24.257,19.05 21.59,19.05 20.511,20.13 ; D20.NEG 43.045,28.18 41.275,26.41 41.275,22.987 40.069,21.78 38.005,21.78 36.799,20.574 33.655,20.574 ; 20.002,25.717 19.304,25.019 19.304,21.336 20.511,20.13 ; 20.002,25.717 20.955,26.67 24.638,26.67 25.019,27.051 ; 20.511,20.13 22.225,21.844 29.845,21.844 D17.NEG 33.655,20.574
R4: D6.NEG D7.NEG D8.NEG D9.NEG D10.NEG D11.NEG D12.NEG U4.18 | length 48.8
  Top Layer w0.33: U4.18@13.341,37.987 13.341,23.046 13.361,23.026
  Top Layer w0.4: 13.361,23.026 13.527,22.86 15.367,22.86 ; D10.NEG@15.367,20.687 15.367,22.86 ; D11.NEG 15.367,22.86 ; D12.NEG 17.667,25.16 20.687,28.18 22.754,28.18 21.069,29.865 21.069,30.352 D6.NEG ; D8.NEG 23.114,16.383 21.717,14.986 20.941,14.986 20.941,16.651 17.653,19.939 17.653,22.86 15.367,22.86
touch1: pad.10@56.642,54.483 U4.3 | length 48.9
  Top Layer w0.3: U4.3@18.546,45.466 18.546,48.01 20.701,50.165 22.929,50.165 23.017,50.077 23.053,50.04 ccw(c32.512,54.483) 41.971,50.04 42.007,50.077 42.095,50.165 52.959,50.165 57.153,54.359 57.153,54.483 pad.10@57.277,54.483
touch2: pad.10@32.512,54.483 U4.4 | length 14.7
  Top Layer w0.3: U4.4@17.896,45.339 17.896,48.376 21.59,52.07 pad.10@28.027,52.07
vcc: LS1.1 LS2.1A R3.2 | length 19.5
  Top Layer w0.5: LS2.1A 19.812,70.354 19.812,72.859 20.105,73.152 24.892,73.152 25.527,73.787 25.527,74.803 25.527,76.073
  Top Layer w0.7: LS1.1 17.382,71.645 17.732,71.645 R3.2 ; R3.2@18.28,71.351 19.277,70.354 LS2.1A@19.539,70.354
vcm: D22.2 U4.9 | length 33.8
  Top Layer w0.3: U4.9@14.646,45.593 14.646,51.857 15.132,52.343 15.132,53.232 15.367,53.467 15.367,56.125 ; 15.376,56.134 15.676,56.434 16.175,56.434 17.399,57.658 17.399,66.167 18.669,67.437 21.336,67.437 22.86,68.961 D22.2 23.269,70.739 25.146,70.739 25.527,70.358
VDD: C4.2 C5.2 J2.2 J3.2 U2.1 U3.5 U3.6 U3.7 U3.8 | length 99.2
  Top Layer w0.8: J3.2@39.624,76.327 40.005,76.708 40.005,78.105 41.275,79.375 52.578,79.375 ; J2.2 52.578,79.375 ; U2.1 70.821,79.375 ; 74.791,32.258 75.692,32.258 76.962,32.258 78.232,32.258 79.502,33.528 79.502,67.564 ; C5.2@77.311,75.978 79.502,73.787 79.502,67.564 ; C4.2 77.597,67.564 79.502,67.564 ; C5.2 77.47,78.359 76.454,79.375 70.821,79.375 ; 52.578,79.375 70.821,79.375
pads on no net: D30.POS D31.POS D39.POS D40.POS J1.2 Q1.1 R8.2 U4.1 U4.2 U4.7 U4.25 U4.26
copper on no net: | length 118.4
  Top Layer w0.254: 134.62,52.197 136.652,52.197 136.652,54.229 134.62,54.229 134.62,52.197 ; 136.144,53.213 ccw(c135.636,53.213) 136.144,53.213
  Top Layer w0.3: 18.416,41.402 25.527,41.402 27.686,39.243 35.892,39.243 36.068,39.419 36.068,40.693 ; 19.685,39.751 23.495,39.751 25.273,37.973 51.054,37.973 51.992,38.911 53.993,38.911 59.358,38.911 60.029,39.582 60.029,40.397 60.325,40.693 ; 19.939,40.386 25.527,40.386 27.305,38.608 50.165,38.608 52.25,40.693 53.213,40.693 ; 20.195,42.164 26.289,42.164 27.76,40.693 28.956,40.693

## Polygon pours and split planes (outlines as drawn)
GND on Top Layer "NONET_L01_P024" (hatched 90Degree grid 0.5 track 0.2, shelved, pour order 24): 75.946,71.374 115.697,71.374 115.57,71.247 115.57,9.779 76.073,9.779

## Keep-outs
Keep-Out Layer:
  lines w0.7: 0,-0.381 0,85 150,85 150,0 0,0

## Other copper
Top Layer:
  text "Smart_Sperlus" at 137.033,54.61 h1.3 r90

## Silkscreen, mask and mechanical layers (free items; w line width, h text height)
Top Solder:
  lines w0.254: 111.633,46.736 114.173,46.736 114.173,66.294 111.633,66.294 111.633,46.736
Bottom Solder:
  lines w0.2: 9.525,10.795 9.525,80.518 80.137,80.518 80.137,10.795 9.525,10.795
Mechanical 4:
  rectangle: 58.039,43.149 64.039,49.149
  rectangle: 50.134,50.896 56.134,56.896
  rectangle: 42.291,43.149 48.291,49.149
  rectangle: 34.386,50.896 40.386,56.896
  rectangle: 26.543,43.149 32.543,49.149
  rectangle: 18.638,50.896 24.638,56.896
  rectangle: 10.764,43.149 16.764,49.149
  rectangle: 26.543,50.896 32.543,56.896
  rectangle: 42.291,50.896 48.291,56.896
  rectangle: 58.039,50.896 64.039,56.896
  rectangle: 10.795,50.896 16.795,56.896

## Text inside footprints (layer, text, board x,y; h text height)
BT1: Top Overlay "+" at 28.263,12.332 h1.15 r90
U2: Top Overlay "-" at 68.196,75.06 h0.81 r270; Top Overlay "+" at 70.486,75.059 h0.81 r270